# Altium PCB BadUSB.PcbDoc
Units mil, origin at the board's own origin, x right, y up, seen from the top; angles counter-clockwise.
Board outline 1299.21 x 551.18 mil, 2 copper layers (Top Layer, Bottom Layer), stack 61.756 mil thick; 16 components, 20 nets, 89 pads, 20 vias.
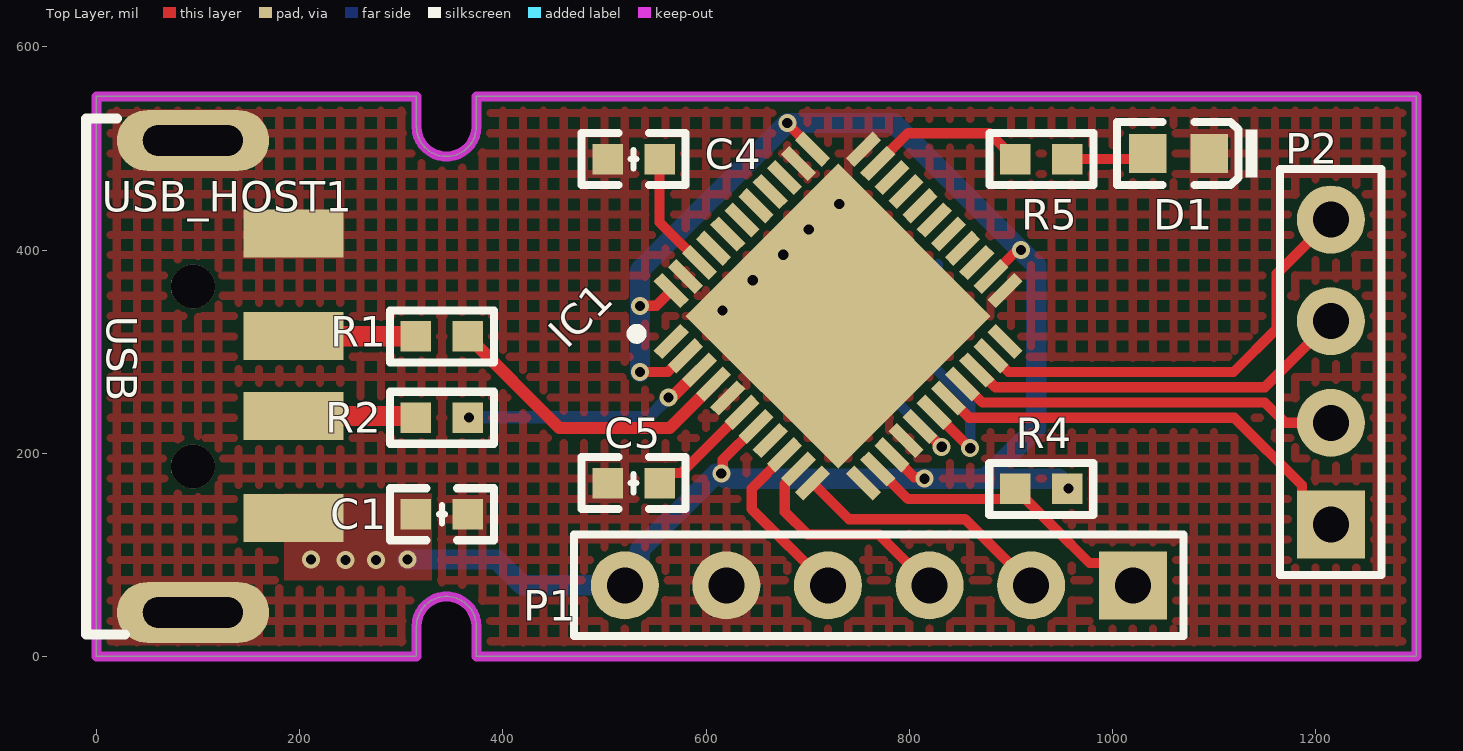
[diagram p0: Top Layer view]
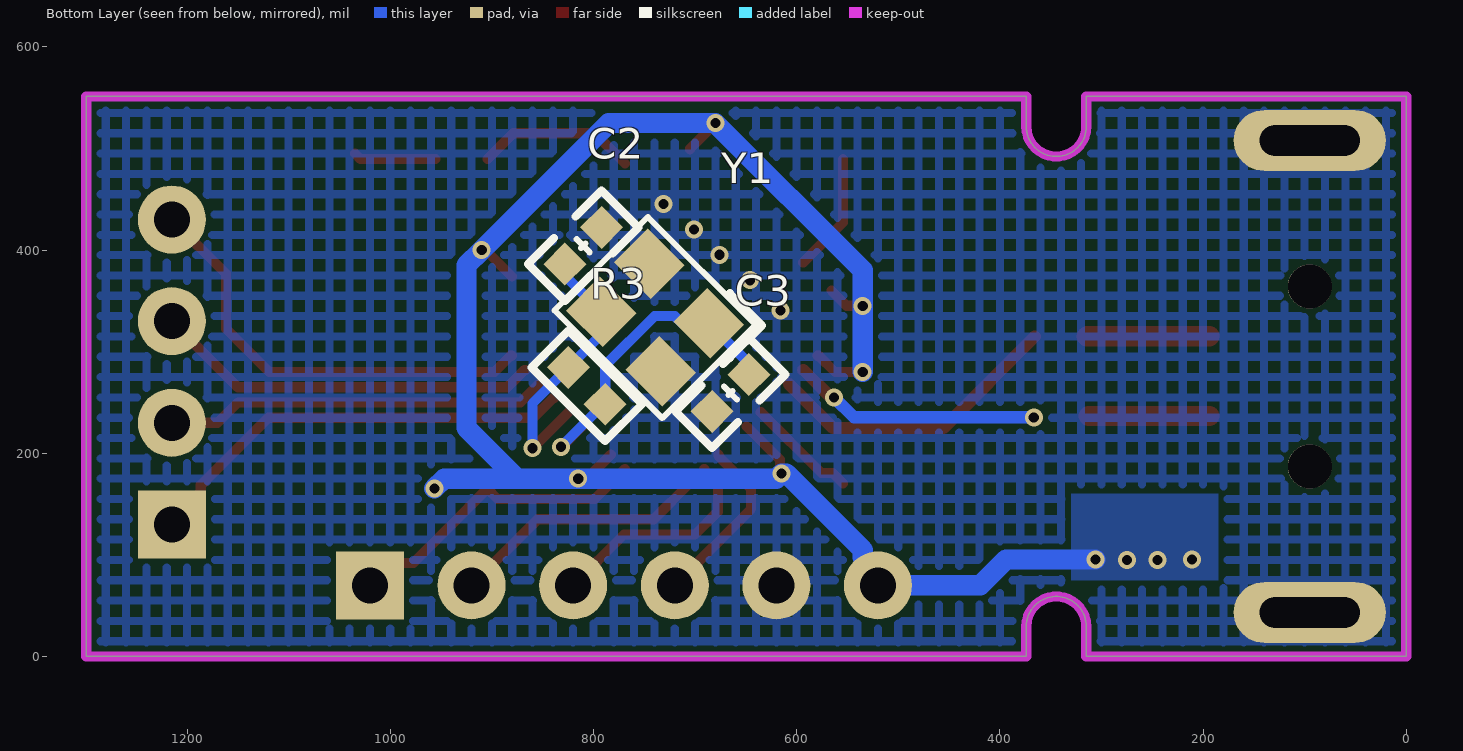
[diagram p1: Bottom Layer view, seen from below]

## Layer stack, top to bottom
Top Solder: solder mask 1, SM-001, Dk 4
Top Layer: signal copper 1.378
Dielectric 1: core 59, Core-043, Dk 4.3
Bottom Layer: signal copper 1.378
Bottom Solder: solder mask 1, SM-001, Dk 4

## Board outline
0,0 0,551.18 314.96,551.18 314.96,521.65 ccw(c344.49,521.65) 374.02,521.65 374.02,551.18 1299.21,551.18 1299.21,0 374.02,0 374.02,29.53 ccw(c344.49,29.53) 314.96,29.53 314.96,0

## Design rules (kind name [scope] priority, off if disabled: settings)
Clearance [All] p1: gap=5 ignorepadtopadclearanceinfootprint=TRUE
PolygonConnect [All] p1: connectstyle=Direct reliefconductorwidth=10 reliefentries=4 polygonreliefangle="90 Angle" airgapwidth=10
RoutingVias [All] p1: holewidth=28 width=50 viastyle="Through Hole" minholewidth=7.87 minwidth=17.72 maxholewidth=28 maxwidth=50
SolderMaskExpansion [All] p1: expansion=4 istentingtop=FALSE
Width [All] p1: maxlimit=30 minlimit=6 preferedwidth=10 minimp=50.000000 maximp=50.000000 favimp=50.000000
30 further rules are at their usual default settings.

## Components (designator, comment, footprint, x,y, rotation, side; value= is the part's Value field where it differs from the comment)
C1 "0.1uF" "C 0603_L" 340,140 r180 top
C2 "22pF" "C 0603_L" 810.1,404.25 r135 bottom
C3 "22pF" "C 0603_L" 665.15,259.29 r315 bottom
C4 "0.1uF" "C 0603_L" 528.75,489.55 r180 top
C5 "1uF" "C 0603_L" 528.75,170.56 r180 top
D1 "蓝灯 0603" 0603_LED_S1 1065,495 r180 top
IC1 "ATMEGA32U4RC-MU" QFN50P700X700X100-45N-D 730,335 r45 top
P1 "Header 6" HDR2.54-LI-6P 770,70 r180 top
P2 "CON4" HDR2.54-LI-4P 1215,280 r90 top
R1 "22R" "R 0603_L" 340,315 r180 top
R2 "22R" "R 0603_L" 340,235 r180 top
R3 "1M" "R 0603_L" 806.57,266.36 r45 bottom
R4 "10K" "R 0603_L" 930,165 r0 top
R5 "10K" "R 0603_L" 930,489.55 r180 top
USB_HOST1 "USB_A_90" USB_A/P_B 95,276.11 r270 top
Y1 "16MHZ 20PF 10PPM" "OSC 3225-4P" 739.39,333.54 r45 bottom

## Footprints (in the part's own frame and the unit in brackets; to place one, negate y for a bottom-side part, rotate by r counter-clockwise, add the part's x,y. Pads: shape width x height; smd on the part's side, far side on the other; paste and mask are expansions set on the pad)
0603_LED_S1 [mm]
  rect 0.93x0.98 smd: A(0.77,0) K(-0.77,0)
  silkscreen extent -1.97,-0.79 1.54,0.79, body extent -0.8,-0.4 0.8,0.4, height 0.6
"C 0603_L" [mil] "无极性贴片电容"
  rect 30x30 smd: 1(-25.59,0) 2(25.59,0)
  silkscreen extent -51,-26 51,26, body extent -31,-16 31,16, height 32
HDR2.54-LI-4P [mm] "排针，4脚"
  rect 1.7x1.7 hole 0.9: 1(-3.81,0)
  round 1.7 hole 0.9: 2(-1.27,0) 3(1.27,0) 4(3.81,0)
  silkscreen extent -5.08,-1.27 5.08,1.27, body extent -5.08,-1.27 5.08,1.27, height 8.5
HDR2.54-LI-6P [mm] "排针，6脚"
  rect 1.7x1.7 hole 0.9: 1(-6.35,0)
  round 1.7 hole 0.9: 2(-3.81,0) 3(-1.27,0) 4(1.27,0) 5(3.81,0) 6(6.35,0)
  silkscreen extent -7.62,-1.27 7.62,1.27, body extent -7.62,-1.27 7.62,1.27, height 8.5
"OSC 3225-4P" [mm] "3.2*2.5*0.7mm(长宽高)"
  rect 1.3x1.2 smd: 1(-1.05,-0.85) 2(1.05,-0.85) 3(1.05,0.85) 4(-1.05,0.85)
  silkscreen extent -2.03,-1.75 1.91,1.65, body extent -1.6,-1.25 1.6,1.25, height 0.7
QFN50P700X700X100-45N-D [mm]
  rect 0.95x0.3 smd: 1(-3.4,2.5) 2(-3.4,2) 3(-3.4,1.5) 4(-3.4,1) 5(-3.4,0.5) 6(-3.4,0) 7(-3.4,-0.5) 8(-3.4,-1) 9(-3.4,-1.5) 10(-3.4,-2) 11(-3.4,-2.5) 23(3.4,-2.5) 24(3.4,-2) 25(3.4,-1.5) 26(3.4,-1) 27(3.4,-0.5) 28(3.4,0) 29(3.4,0.5) 30(3.4,1) 31(3.4,1.5) 32(3.4,2) 33(3.4,2.5)
  rect 0.3x0.95 smd: 12(-2.5,-3.4) 13(-2,-3.4) 14(-1.5,-3.4) 15(-1,-3.4) 16(-0.5,-3.4) 17(0,-3.4) 18(0.5,-3.4) 19(1,-3.4) 20(1.5,-3.4) 21(2,-3.4) 22(2.5,-3.4) 34(2.5,3.4) 35(2,3.4) 36(1.5,3.4) 37(1,3.4) 38(0.5,3.4) 39(0,3.4) 40(-0.5,3.4) 41(-1,3.4) 42(-1.5,3.4) 43(-2,3.4) 44(-2.5,3.4)
  rect 5.4x5.4 smd: 45(0,0)
  silkscreen extent -4,3.13 -3.75,3.37, body extent -3.55,-3.55 3.55,3.55, height 1
"R 0603_L" [mil] "1/10W贴片电阻"
  rect 30x30 smd: 1(-25.59,0) 2(25.59,0)
  silkscreen extent -51,-26 51,26, body extent -31,-16 32,16, height 16
USB_A/P_B [mm] "A型USB 插头，20*13*4.5mm"
  round 1.1 hole 1.1: 0(-2.237,0) 0(2.263,0)
  rect 1.2x2.5 smd: 1(3.556,2.508) 2(1,2.508) 3(-1,2.508) 4(-3.556,2.508)
  oval 1.524x3.81 hole 0.762 slot 2.5 at 90 deg: 4(-5.887,0) 4(5.913,0)
  silkscreen extent -6.44,-2.67 6.46,-1.7, body extent -6.46,-17.9 6.49,2.7, height 3.25

## Part data
C1 C2 C3 C4 C5: library part "0402 1.0uF (105) 10% 25V", "贴片电容", Package=0402, SuppliersPartNumber=C52923, ComponentLink1Description=供应商链接, ComponentLink1URL=http://www.szlcsc.com/product/details_53938.html, Supplier=LC
D1: library part "0603 蓝灯", "发光二极管", Package=0603, SuppliersPartNumber=C72041, ComponentLink1Description=供应商链接, ComponentLink1URL=http://www.szlcsc.com/product/details_73150.html, Supplier=LC
IC1: "Integrated Circuit", Manufacturer_Name=Microchip, Mouser Part Number=556-ATMEGA32U4RC-MU, Arrow Part Number=ATMEGA32U4RC-MU, Arrow Price/Stock=https://www.arrow.com/en/products/atmega32u4rc-mu/microchip-technology, Datasheet Link=http://ww1.microchip.com/downloads/en/DeviceDoc/Atmel-7766-8-bit-AVR-ATmega16U4-32U4_Datasheet.pdf, Height=1mm, Manufacturer_Part_Number=ATMEGA32U4RC-MU, Mouser Price/Stock=https://www.mouser.co.uk/ProductDetail/Microchip-Technology-Atmel/ATMEGA32U4RC-MU?qs=7AReRZHh%2FSu01hzuv0rGvg%3D%3D
P1: "Header, 6-Pin", LatestRevisionDate=17-Jul-2002, LatestRevisionNote="Re-released for DXP Platform.", Publisher="Altium Limited"
P2: "Connector"
R1 R2 R3 R4 R5: library part "0402 0Ω (0R0) 1%", "贴片电阻", Package=0402, SuppliersPartNumber=C17168, ComponentLink1Description=供应商链接, ComponentLink1URL=http://www.szlcsc.com/product/details_17853.html, Supplier=LC
Y1: library part "SMD-3225_4P  12MHZ 20PF 10PPM", "贴片晶振", Package=SMD-3225_4P, SuppliersPartNumber=C9002, ComponentLink1Description=供应商链接, ComponentLink1URL=http://www.szlcsc.com/product/details_9522.html, Supplier=LC

## Via types
v1: diameter 17.72, hole 10, Top Layer to Bottom Layer, tented both sides, 20 vias

## Nets (pads, with @x,y where several pads share a name; then routed paths per layer and width w, separated by ;. In a path a pad name is that pad's centre, name@x,y a point inside that pad or via, vN(x,y) a via of type N, cw(c..) or ccw(c..) an arc to the next point about the centre after c; other vN are vias at no path point)
AREF: C4.1 IC1.42 | length 117.9
  Top Layer w10: C4.1 554.35,427.13 IC1.42
D+: IC1.4 R1.1 | length 297.1
  Top Layer w12: R1.1 455.6,225 564.32,225 IC1.4
D-: IC1.3 R2.1 | length 246.3
  Top Layer w12: v1(563.17,255) 566.35,255 593.46,282.11 IC1.3
  Bottom Layer w12: v1(366.64,235.37) 543.54,235.37 v1(563.17,255)
GND: C1.1 C2.2 C3.2 C4.2 C5.2 D1.K IC1.5 IC1.15 IC1.23 IC1.33 IC1.35 IC1.43 IC1.45 P1.5 USB_HOST1.4 Y1.2 Y1.4
  other v1: 616.05,340.37 646.05,370.37 676.05,395.37 701.05,420.37 731.05,445.37
LED: IC1.32 R5.2 | length 158.3
  Top Layer w10: IC1.32 798.64,515 878.96,515 R5.2
MISO: IC1.11 P1.2 | length 256.8
  Top Layer w10: IC1.11 740.7,135 855,135 P1.2
MOSI: IC1.10 P1.3 | length 220.3
  Top Layer w10: IC1.10 691.03,183.39 677.55,169.91 677.55,142.45 700,120 770,120 P1.3
NetD1_A: D1.A R5.1 | length 81.3
  Top Layer w10: R5.1 1029.24,489.55 D1.A
NetR1_2: R1.2 USB_HOST1.3 | length 120.9
  Top Layer w20: USB_HOST1.3 193.98,315.24 314.17,315.24 R1.2
NetR2_2: R2.2 USB_HOST1.2 | length 121.4
  Top Layer w10: R2.2@312.68,236.74 R2.2
  Top Layer w20: USB_HOST1.2 R2.2@312.68,236.74
RESET: IC1.13 P1.1 R4.1 | length 306.8
  Top Layer w10: IC1.13 798.64,155 894.41,155 R4.1 942.67,126.73 977.39,92.01 997.99,92.01 P1.1
RX: IC1.20 P2.3 | length 382.6
  Top Layer w10: IC1.20 867.69,282.11 884.8,265 1150,265 P2.3
SCL: IC1.18 P2.1 | length 433.8
  Top Layer w10: IC1.18 839.85,254.27 859.12,235 1120,235 1186.54,168.46 1186.54,158.46 P2.1
SCLK: IC1.9 P1.4 | length 173
  Top Layer w10: IC1.9 677.11,197.31 645,165.2 645,145 P1.4
SDA: IC1.19 P2.2 | length 378.3
  Top Layer w10: IC1.19 853.77,268.19 871.96,250 1150,250 1170,230 P2.2
TX: IC1.21 P2.4 | length 435.2
  Top Layer w10: IC1.21 881.61,296.03 897.64,280 1119.14,280 1161.62,322.48 1161.62,376.62 P2.4
UCAP: C5.1 IC1.6 | length 109.9
  Top Layer w10: C5.1 564.35,180.57 575.57,180.57 IC1.6
VCC: C1.2 IC1.2 IC1.7 IC1.14 IC1.24 IC1.34 IC1.44 P1.6 R4.2 USB_HOST1.1 | length 1830.6
  Top Layer w10: v1(535,280) 562.36,280 578.39,296.03 IC1.2 ; v1(535,345) 535.27,345.27 550.97,345.27 IC1.44 ; v1(615,180) 616.48,181.48 616.48,193.64 IC1.7 ; v1(680,525) 680,524.6 704.94,499.65 IC1.34 ; IC1.14 805.01,176.48 813.52,176.48 v1(815,175) ; IC1.24 904.88,398.52 908.52,398.52 v1(910,400)
  Bottom Layer w10: v1(956.64,165.36) v1(956.64,165.36)
  Bottom Layer w20: v1(306.05,95.37) 393.99,95.37 419.36,70 P1.6 520,82.7 534.88,97.58 534.88,104.88 610,180 v1(615,180) 620,175 v1(815,175) 875,175 ; v1(535,280) v1(535,345) 535,380 v1(680,525) 785,525 v1(910,400) 925,385 925,225 875,175 ; v1(956.64,165.36) 947,175 875,175
  other v1: 211.05,95.37 245,95 275,95
X1: C2.1 IC1.17 R3.2 Y1.3 | length 274.1
  Top Layer w10: IC1.17 v1(860,205)
  Bottom Layer w10: C2.1 828.2,375.02 Y1.3 792.29,316.83 860,249.11 v1(860,205)
X2: C3.1 IC1.16 R3.1 Y1.1 | length 320.6
  Top Layer w10: IC1.16 811.32,226.43 831.39,206.36 v1(831.97,206.36)
  Bottom Layer w10: C3.1 647.05,288.52 Y1.1 712.84,327.97 719.87,335 740,335 788.47,286.53 R3.1 790.07,248.27 v1(831.97,206.36)
pads on no net: IC1.1 IC1.8 IC1.12 IC1.22 IC1.25 IC1.26 IC1.27 IC1.28 IC1.29 IC1.30 IC1.31 IC1.36 IC1.37 IC1.38 IC1.39 IC1.40 IC1.41 USB_HOST1.0

## Polygon pours and split planes (outlines as drawn)
GND on Top Layer "GND_L01_P003" (hatched 90Degree grid 20 track 8, remove dead copper, pour order 3): -40,600 -40,-40 1335,-40 1340,-45 1340,580 -20,580
VCC on Top Layer "VCC_L01_P000" (solid, remove dead copper, pour order 0): 185,160 185,75 330,75 330,160
GND on Bottom Layer "GND_L02_P002" (hatched 90Degree grid 20 track 8, remove dead copper, pour order 2): -40,600 -40,-40 1335,-40 1340,-45 1340,580 -20,580
VCC on Bottom Layer "VCC_L02_P001" (solid, remove dead copper, pour order 1): 185,160 185,75 330,75 330,160

## Keep-outs
Keep-Out Layer:
  the board outline again, w10

## Silkscreen, mask and mechanical layers (free items; w line width, h text height)
Mechanical 1:
  the board outline again, w10

## Text inside footprints (layer, text, board x,y; h text height)
USB_HOST1: Top Overlay "USB" at 10,335.59 h30 r270